# EAGLE board quarz-pendler_SMD (EAGLE 6.1)
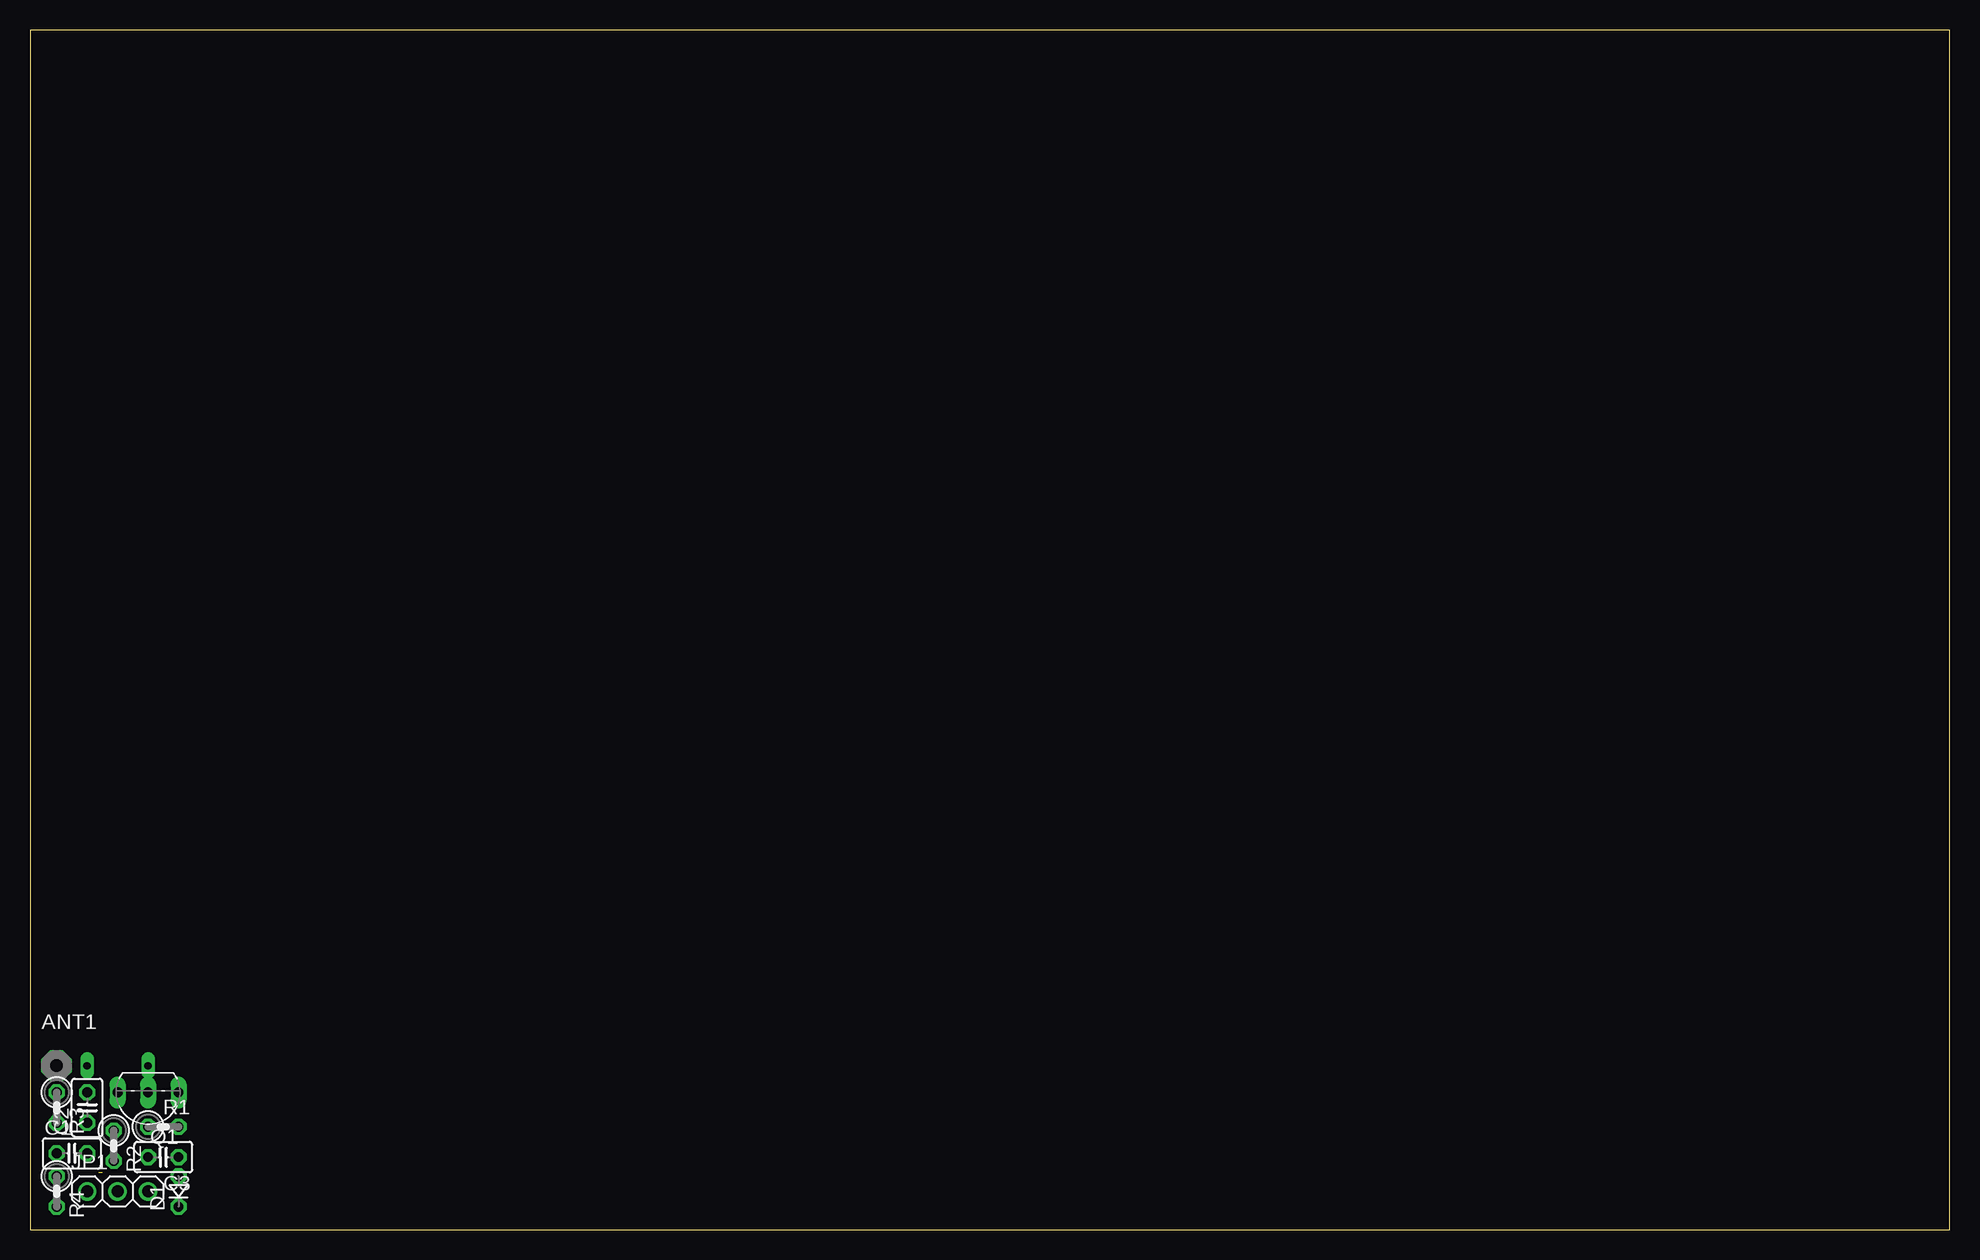
[diagram p0: board, top side]
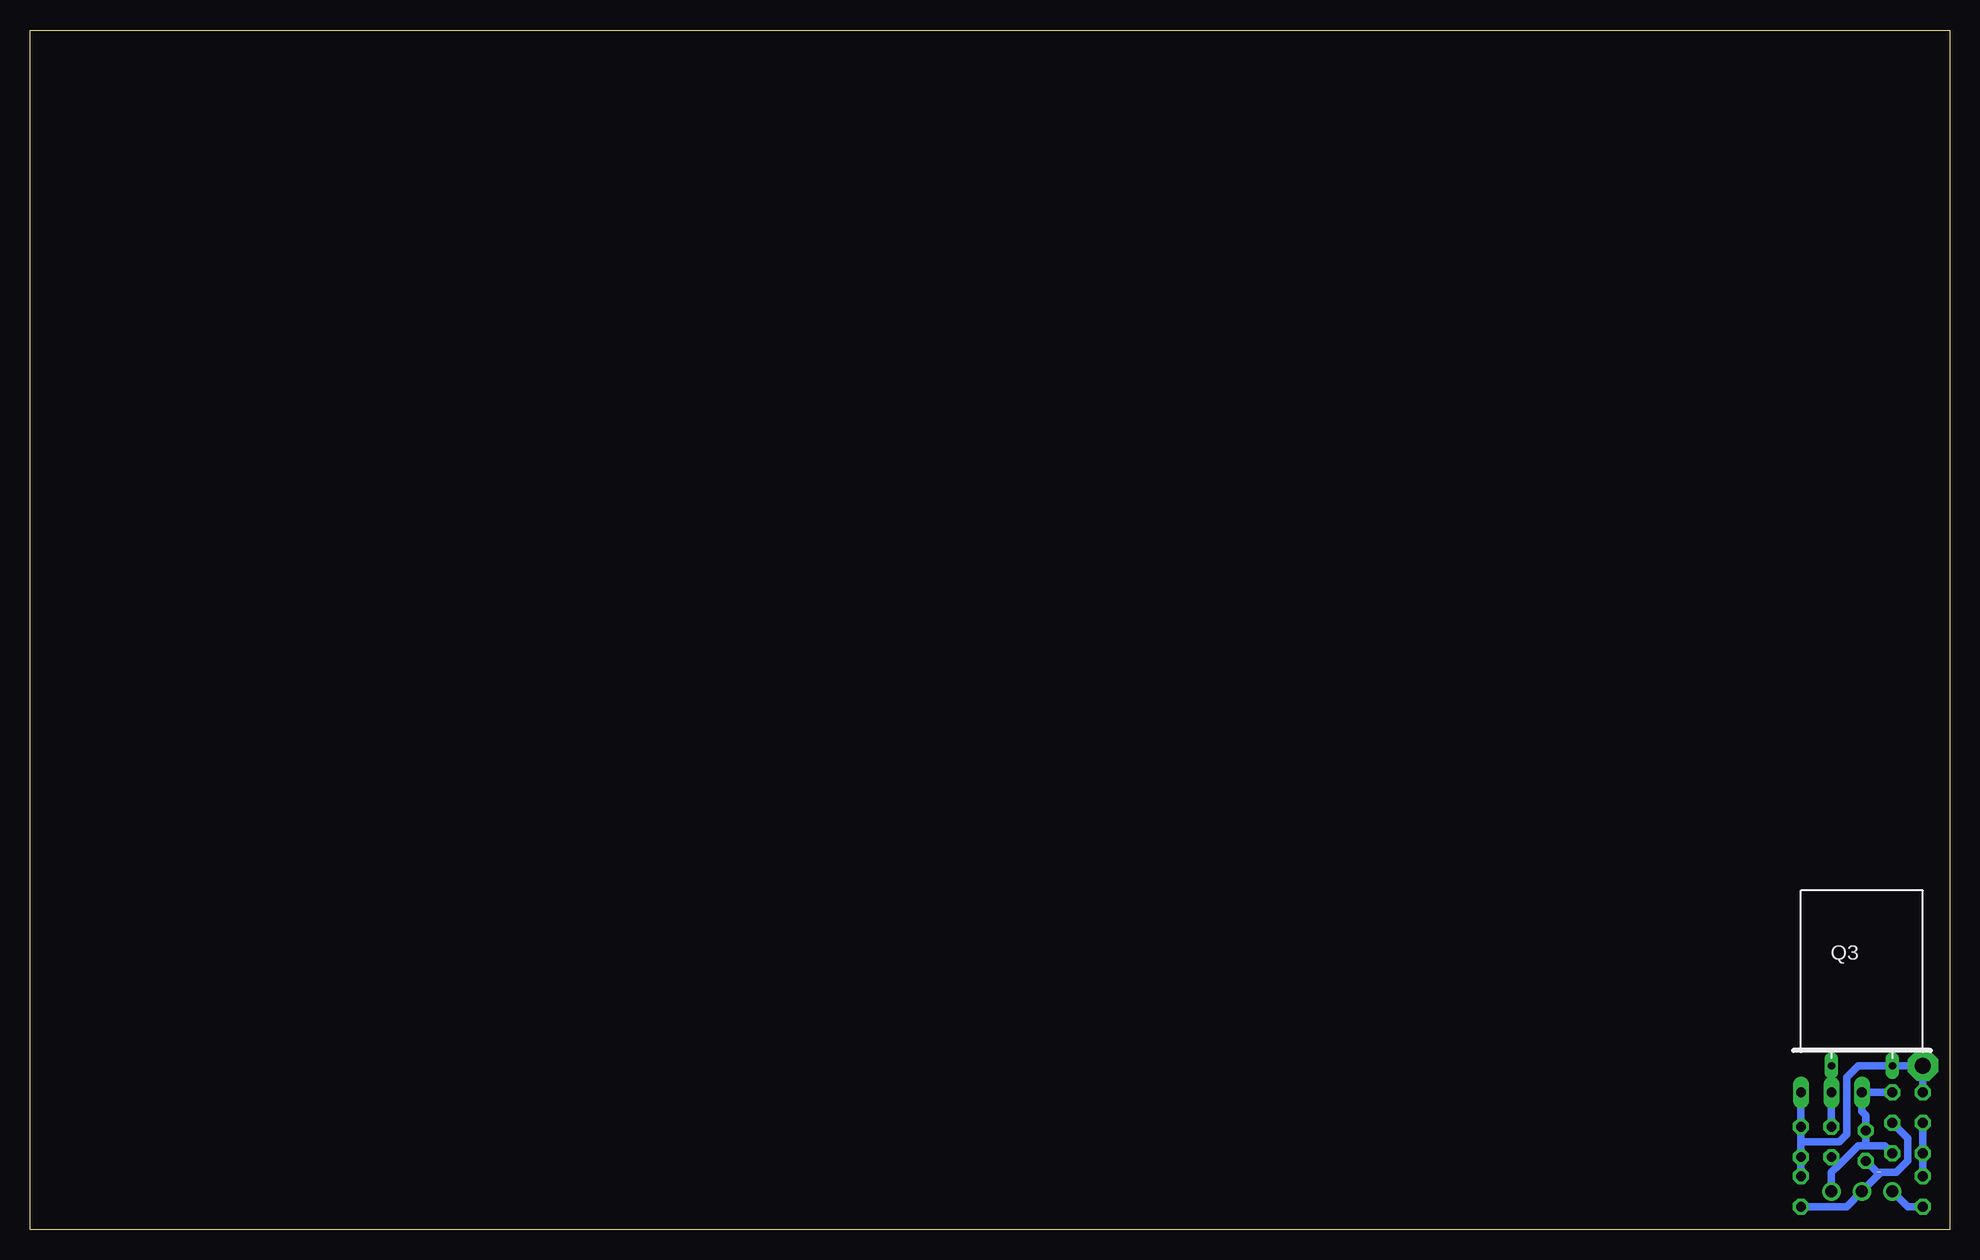
[diagram p1: board, bottom side, seen from below]

Size 160 x 100 mm. Coordinates in mm from the lower left corner, seen from the top.
Outline: 0,0 160,0 160,100 0,100 0,0
Copper layers (1*16): Top 0.035mm / dielectric 1.5mm / Bottom 0.035mm
Design rules: minimum track width 10mil, minimum drill 24mil, track to track 8mil, track to pad 8mil, pad to pad 8mil, via to via 8mil, smd to smd 8mil, copper to edge 40mil, drill to drill 8mil, minimum pad ring 10mil, minimum via ring 8mil, stop-mask expansion 4mil, vias tented up to drill 0mil, thermal gap 10mil

## Footprints (pad centres in the part's own frame; a part is rotated, then mirrored left to right if it is on the bottom)
PAD-01 = drill 1.321 pad 2.54 octagon: 1 0,0
C025-025X050 = drill 0.813 octagon: 1 -1.27,0; 2 1.27,0
D-2.5 = drill 0.813 octagon: A 1.27,0; C -1.27,0
1X03 = drill 1.016: 1 -2.54,0; 2 0,0; 3 2.54,0
TO92-EBC = drill 0.813 long: B 0,-1.27; C -2.54,-1.27; E 2.54,-1.27
Q = drill 0.61 long: 1 -2.54,-7.62; 2 2.54,-7.62
0207/2V = drill 0.813 octagon: 1 -1.27,0; 2 1.27,0

## Placement (x,y rotation side)
ANT1  [PAD-01]  2.22,13.65 0 top
C1  [C025-025X050]  3.49,6.35 0 top
C2  u1  [C025-025X050]  4.76,10.16 90 top
C3  12p  [C025-025X050]  11.11,6.03 180 top
D1  1N4148  [D-2.5]  12.38,3.17 90 top
JP1  [1X03]  7.3,3.17 0 top
Q1  BC548  [TO92-EBC]  9.84,10.16 180 top
Q3  13.56M  [Q]  7.3,21.27 0 bottom
R1  100k  [0207/2V]  11.11,8.57 0 top
R2  100k  [0207/2V]  6.99,6.99 270 top
R3  1k  [0207/2V]  2.22,10.16 270 top
R4  100  [0207/2V]  2.22,3.17 270 top

## Library data of the parts
ANT1 = discrete
C1-C3 R1-R4 = rcl
D1 = diode
JP1 = adafruit
Q1 = transistor-npn
Q3 = special

## Nets
+5: JP1.1 R4.2
DAT: C2.1 D1.C JP1.2 R2.2
GND: C1.2 C2.2 C3.2 JP1.3 Q1.E R2.1
N$1: ANT1.1 C3.1 D1.A Q1.C Q3.2 R1.2 R3.1
N$2: Q1.B Q3.1 R1.1
N$6: C1.1 R3.2 R4.1

## Tracks (layer width: path | path; a pad name or v marks a point on that pad's centre or on a via)
+5
  Bottom 0.61: R4.2 3.49,1.91 JP1.1
DAT  (1 unrouted)
  Bottom 0.61: C2.1 3.49,7.62 3.49,5.71 4.45,4.76 5.71,4.76 JP1.2 8.57,1.91 D1.C | R2.2 6.03,4.76
GND
  Bottom 0.61: C2.2 Q1.E 7.3,9.84 6.99,9.53 R2.1 6.99,6.99 | C1.2 5.4,6.99 6.99,6.99 | 6.99,6.99 7.62,6.99 9.21,5.4 | JP1.3 9.84,4.76 9.21,5.4 | C3.2 9.21,5.4
N$1
  Bottom 0.61: Q1.C R1.2 12.38,7.3 | 12.38,7.3 C3.1 D1.A | R3.1 ANT1.1 Q3.2 7.62,13.65 8.57,12.7 8.57,7.94 9.21,7.3 12.38,7.3
N$2
  Bottom 0.61: Q3.1 Q1.B R1.1
N$6
  Bottom 0.61: R3.2 C1.1 R4.1